# Altium PCB ST_LINK_V2.1.PcbDoc
Units mil, origin at the board's own origin, x right, y up, seen from the top; angles counter-clockwise.
Board outline 1520 x 655 mil, 2 copper layers (Top Layer, Bottom Layer); 55 components, 47 nets, 188 pads, 67 vias.
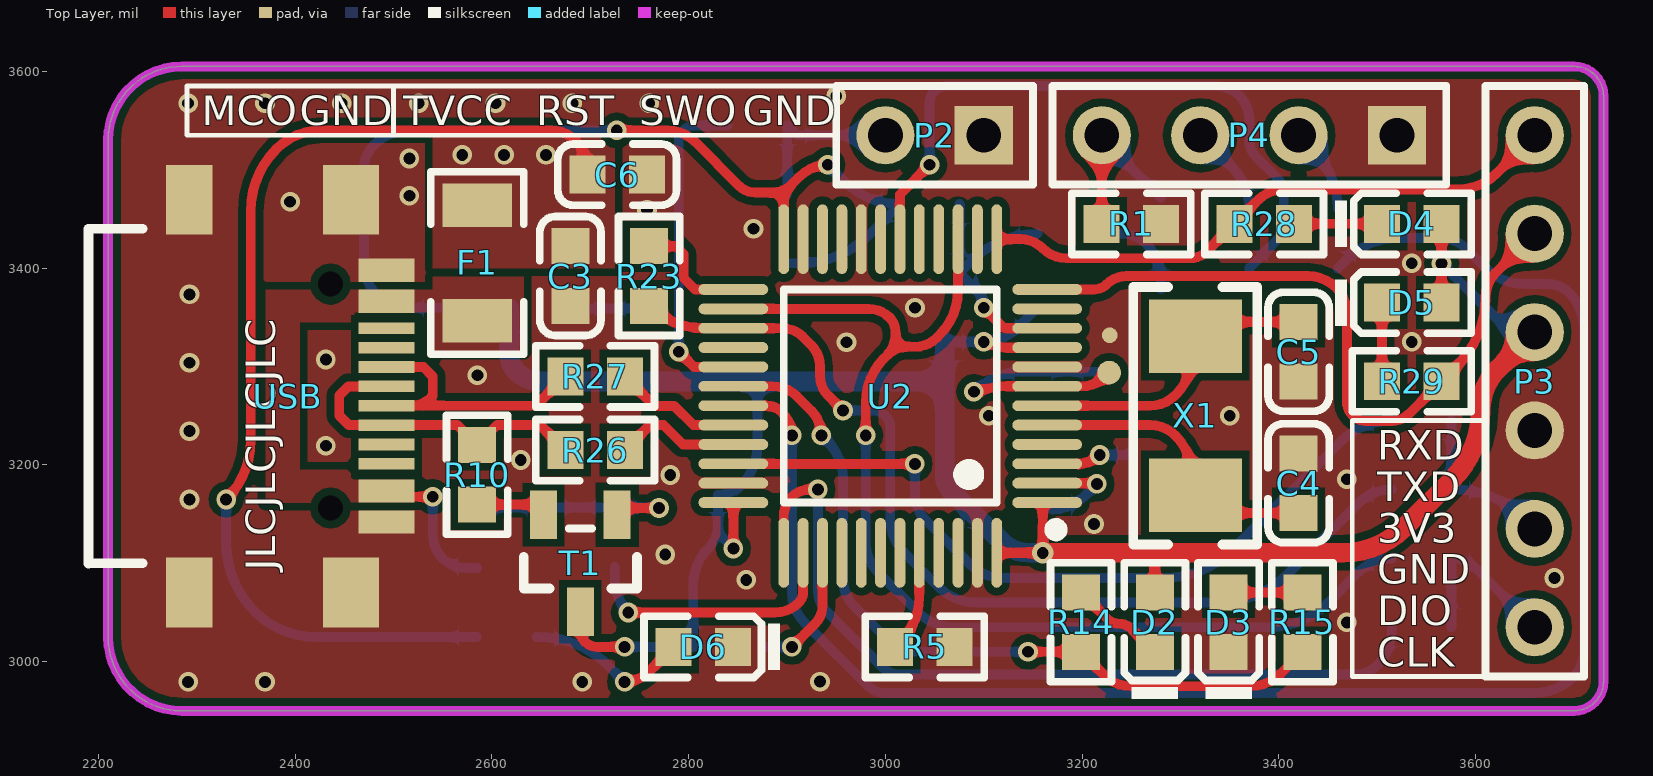
[diagram p0: Top Layer view]
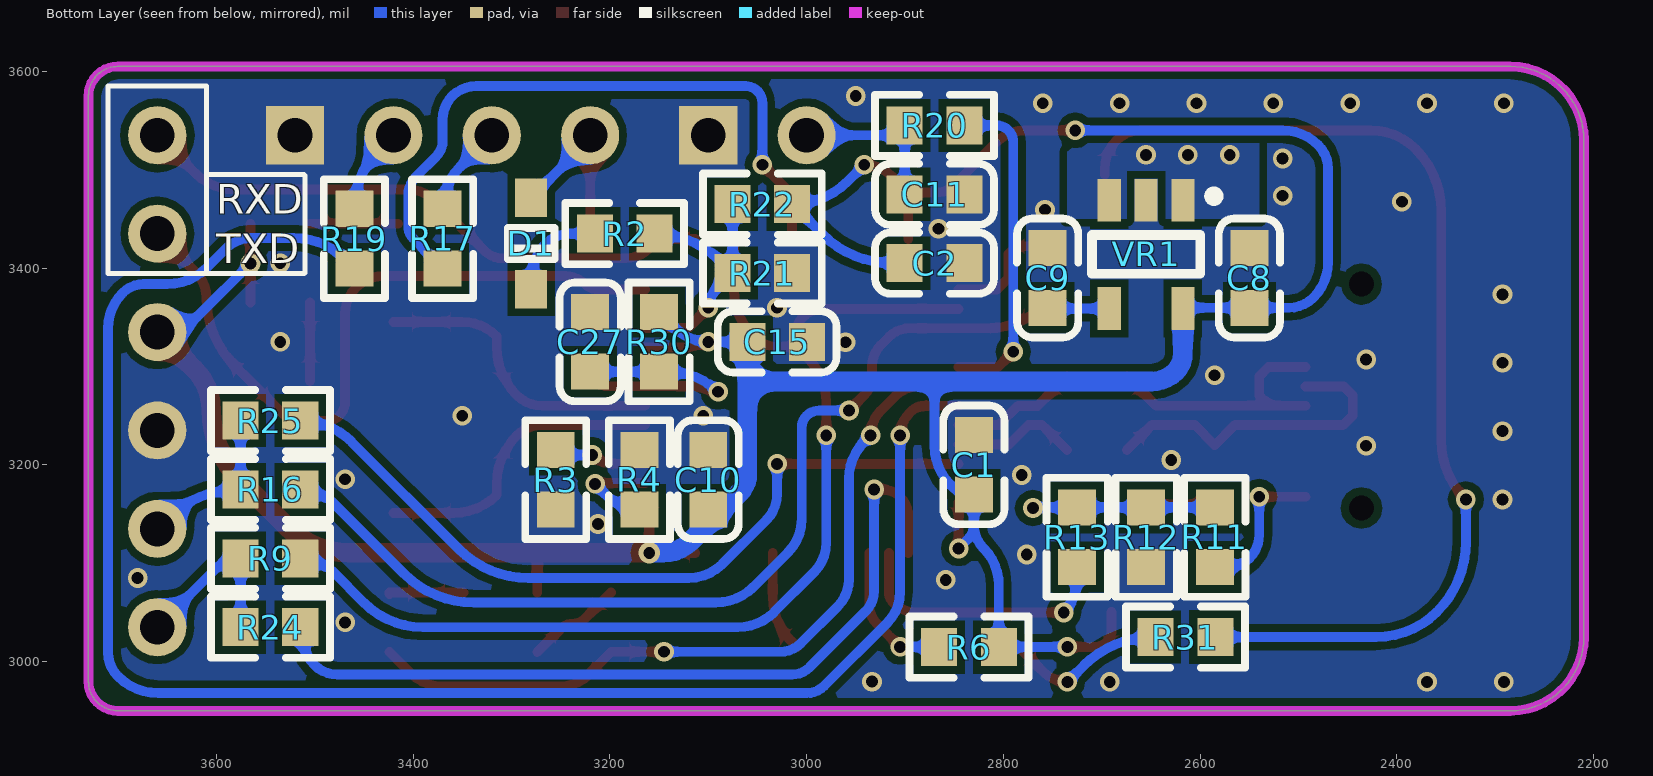
[diagram p1: Bottom Layer view, seen from below]
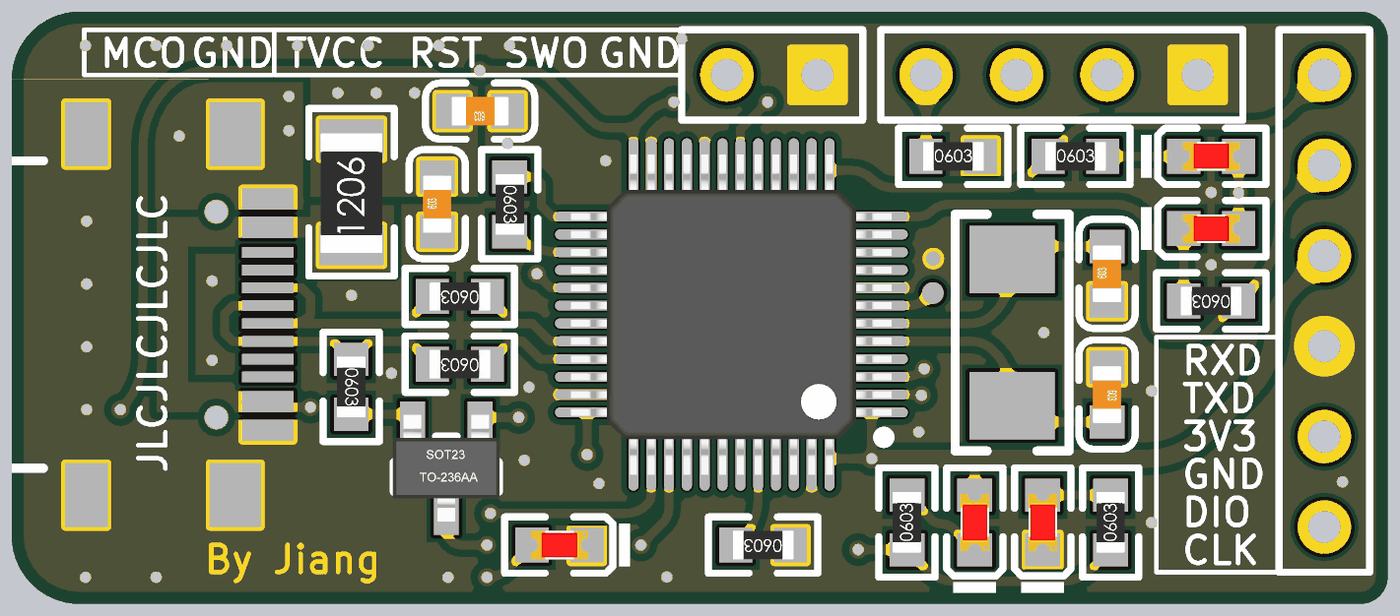
[diagram p2: 3D render of the assembled board from above, using the file's embedded part models]
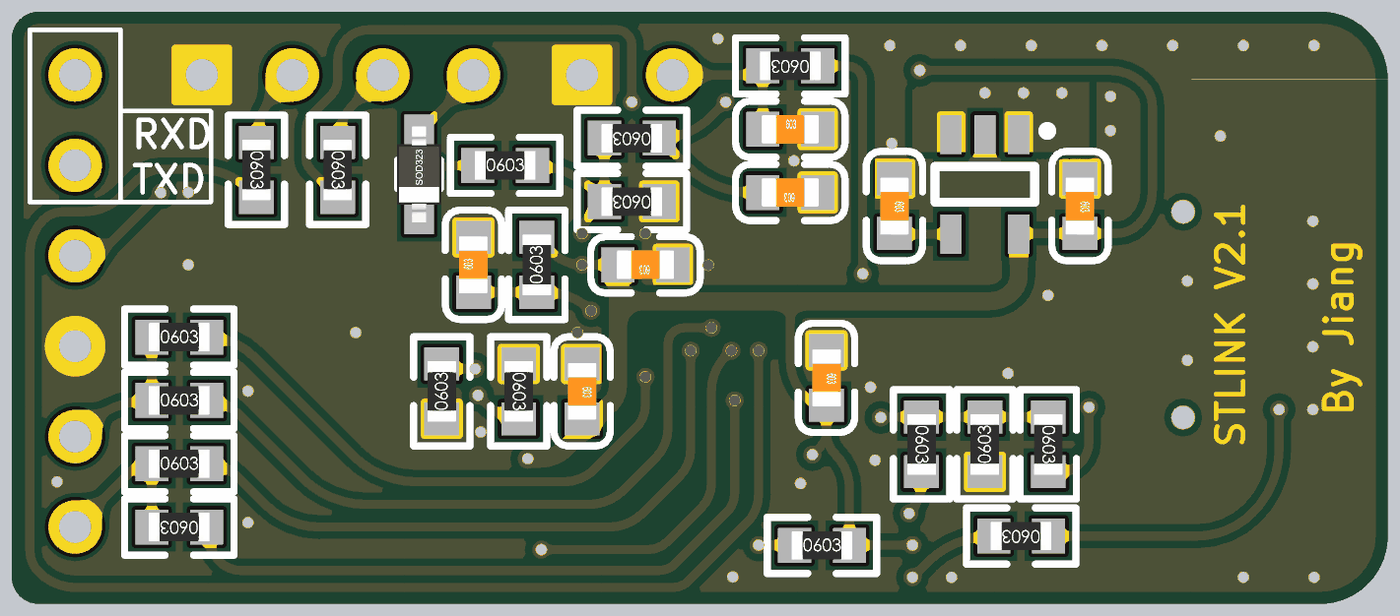
[diagram p3: 3D render of the assembled board from below, using the file's embedded part models]

## Layer stack, top to bottom
Top Solder: solder mask 0.4, Solder Resist, Dk 3.5
Top Layer: signal copper 1.4
Dielectric 1: dielectric 12.6, FR-4, Dk 4.8
Bottom Layer: signal copper 1.4
Bottom Solder: solder mask 0.4, Solder Resist, Dk 3.5

## Board outline
2285,2950 cw(c2285,3025) 2210,3025 2210,3530 cw(c2285,3530) 2285,3605 3700,3605 cw(c3700,3575) 3730,3575 3730,2980 cw(c3700,2980) 3700,2950

## Design rules (kind name [scope] priority, off if disabled: settings)
Clearance [All] p1: gap=8 ignorepadtopadclearanceinfootprint=TRUE except(0: Arc-Hole Track-Hole SMDPad-Hole THPad-Hole Via-Hole Fill-Hole Poly-Hole Region-Hole Text-Hole)
PolygonConnect PolygonConnect_8 [All vs IsNamedPolygon('Top Layer-5V_USB_CHG 1') Or  IsNamedPolygon('Top Layer-5V_USB_CHG') Or  IsNamedPolygon('Bottom Layer-5V_USB_CHG') Or  IsNamedPolygon('Bottom Layer-GND') Or  IsNamedPolygon('Top Layer-GND') Or  IsNamedPolygon('Top Layer-5V_USB_CHG 2')] p1: connectstyle=Direct reliefconductorwidth=10 reliefentries=4 polygonreliefangle="90 Angle" airgapwidth=10
PolygonConnect PolygonConnect_7 [All vs IsNamedPolygon('Top Layer-5V_USB_CHG 2')] p2: connectstyle=Direct reliefconductorwidth=10 reliefentries=4 polygonreliefangle="90 Angle" airgapwidth=10
PolygonConnect PolygonConnect_6 [All vs IsNamedPolygon('Top Layer-5V_USB_CHG 1')] p3: connectstyle=Direct reliefconductorwidth=10 reliefentries=4 polygonreliefangle="90 Angle" airgapwidth=10
PolygonConnect PolygonConnect_5 [All vs IsNamedPolygon('Top Layer-No Net') Or  IsNamedPolygon('Top Layer-5V_USB_CHG') Or  IsNamedPolygon('Bottom Layer-No Net') Or  IsNamedPolygon('Bottom Layer-5V_USB_CHG') Or  IsNamedPolygon('Top Layer-5V_USB_CHG 2')] p4: connectstyle=Direct reliefconductorwidth=10 reliefentries=4 polygonreliefangle="90 Angle" airgapwidth=10
PolygonConnect PolygonConnect_4 [All vs IsNamedPolygon('Top Layer-5V_USB_CHG 2')] p5: connectstyle=Direct reliefconductorwidth=10 reliefentries=4 polygonreliefangle="90 Angle" airgapwidth=10
PolygonConnect PolygonConnect_3 [All vs IsNamedPolygon('Top Layer-5V_USB_CHG 1') Or  IsNamedPolygon('Top Layer-5V_USB_CHG') Or  IsNamedPolygon('Bottom Layer-5V_USB_CHG')] p6: connectstyle=Direct reliefconductorwidth=10 reliefentries=4 polygonreliefangle="90 Angle" airgapwidth=10
PolygonConnect PolygonConnect_2 [All vs IsNamedPolygon('Top Layer-5V_USB_CHG') Or  IsNamedPolygon('Top Layer-5V_USB_CHG 1')] p7: connectstyle=Direct reliefconductorwidth=10 reliefentries=4 polygonreliefangle="90 Angle" airgapwidth=10
PolygonConnect PolygonConnect_1 [All vs IsNamedPolygon('Top Layer-5V_USB_CHG 1') Or  IsNamedPolygon('Top Layer-5V_USB_CHG')] p8: connectstyle=Direct reliefconductorwidth=10 reliefentries=4 polygonreliefangle="90 Angle" airgapwidth=10
PolygonConnect [All] p9: connectstyle=Relief reliefconductorwidth=10 reliefentries=4 polygonreliefangle="90 Angle" airgapwidth=10
RoutingVias [All] p1: holewidth=12 width=20 viastyle="Through Hole" minholewidth=12 minwidth=18 maxholewidth=28 maxwidth=50
SilkToSilkClearance [All] p1: silktosilkclearance=5
SilkToSolderMaskClearance [IsPad] p1: minsilkscreentomaskgap=5 clearancetoexposedcopper=TRUE
SolderMaskExpansion [All] p1: expansion=4 istentingtop=FALSE
Width [All] p1: maxlimit=50 minlimit=10 preferedwidth=10
28 further rules are at their usual default settings.

## Components (designator, comment, footprint, x,y, rotation, side; value= is the part's Value field where it differs from the comment)
C1 "Capacitor" 0603_C 2830,3200 r270 bottom value=100nF
C2 "Capacitor" 0603_C 2870,3405 r0 bottom value=100nF
C3 "104" 0603_C 2679.96,3391.97 r90 top
C4 "Capacitor" 0603_C 3420,3181.42 r270 top locked value=20pF
C5 "Capacitor" 0603_C 3420,3315 r90 top locked value=20pF
C6 "104" 0603_C 2727.4,3495 r180 top
C8 "104" 0603_C 2550,3390 r270 bottom
C9 "104" 0603_C 2755,3390 r270 bottom
C10 "Capacitor" 0603_C 3100,3185 r270 bottom value=100nF
C11 "20pF" 0603_C 2870,3475 r180 bottom
C15 "Capacitor" 0603_C 3030,3325 r0 bottom value=100nF
C27 "Capacitor" 0603_C 3220,3325 r90 bottom value=103
D1 "BAT60JFILM" SOD-323 3280,3425 r90 bottom
D2 "绿灯 0603" 0603_LED_S1 3273.86,3040 r90 top
D3 "红灯 0603" 0603_LED_S1 3348.86,3040 r90 top
D4 "红灯 0603" 0603_LED_S1 3535,3445 r0 top
D5 "红灯 0603" 0603_LED_S1 3535,3365 r0 top
D6 "红灯 0603" 0603_LED_S1 2815,3015 r180 top
F1 "Fuse 2" 1206_R 2585.31,3405.22 r90 top
P2 "Header 2" HDR1X2 3100,3535 r180 top locked
P3 "Header 6" HDR1X6 3660,3035 r90 top locked
P4 "Header 4" HDR1X4 3520,3535 r180 top locked
R1 "Resistor" 0603_R 3250,3445 r0 top value=10K
R2 "100R" 0603_R 3185,3435 r180 bottom value=22R
R3 "N/A" 0603_R 3255,3185 r90 bottom value=10K
R4 "Resistor" 0603_R 3170,3185 r270 bottom value=10K
R5 "Resistor" 0603_R 3040,3015 r180 top value=100K
R6 "Resistor" 0603_R 2835,3014.69 r180 bottom value=4.7K
R9 "Resistor" 0603_R 3545,3105 r180 bottom value=22R
R10 "Resistor" 0603_R 2585,3190 r270 top value=1K5
R11 "Resistor" 0603_R 2585,3126.42 r270 bottom value=10K
R12 "Resistor" 0603_R 2655,3126.42 r90 bottom value=36K
R13 "Resistor" 0603_R 2725,3126.42 r270 bottom value=100R
R14 "Resistor" 0603_R 3198.86,3040 r90 top value=330R
R15 "Resistor" 0603_R 3423.86,3040 r90 top value=330R
R16 "Resistor" 0603_R 3545,3175 r180 bottom value=22R
R17 "Resistor" 0603_R 3370,3430 r270 bottom value=22R
R19 "Resistor" 0603_R 3459.74,3430 r270 bottom value=22R
R20 "Resistor" 0603_R 2870,3545 r0 bottom value=100R
R21 "Resistor" 0603_R 3045,3395 r0 bottom value=4K7
R22 "Resistor" 0603_R 3045,3465 r0 bottom value=4K7
R23 "Resistor" 0603_R 2760,3391.97 r270 top value=100R
R24 "Resistor" 0603_R 3545,3035 r0 bottom value=0R
R25 "Resistor" 0603_R 3545,3245 r180 bottom value=0R
R26 "Resistor" 0603_R 2705,3215 r180 top value=10R
R27 "Resistor" 0603_R 2705,3290 r180 top value=10R
R28 "Resistor" 0603_R 3385,3445 r0 top value=1K
R29 "Resistor" 0603_R 3535,3285 r180 top value=1K
R30 "Resistor" 0603_R 3150,3325 r90 bottom value=10K
R31 "Resistor" 0603_R 2615,3025 r0 bottom value=1K
T1 "9013-SOT23" SOT-23(SOT-23-3) 2690,3100 r90 top
U2 "STM32F103CBT6" LQFP-48_7x7x05P 3005,3270 r90 top locked
USB "TYPE-C 12P" "TYPE-C 12P 贴片" 2190,3440 r270 top locked
VR1 "SPX3819M5-L-3-3" SOT-23-5 2655,3414.02 r90 bottom
X1 "XTAL_8M_NX3225GD" SMD-5032_2P 3315,3250 r90 top locked value=8.00Mhz

## Footprints (in the part's own frame and the unit in brackets; to place one, negate y for a bottom-side part, rotate by r counter-clockwise, add the part's x,y. Pads: shape width x height; smd on the part's side, far side on the other; paste and mask are expansions set on the pad)
0603_C [mm]
  rect 0.93x0.98 smd: 1(-0.77,0) 2(0.77,0)
  silkscreen extent -1.53,-0.79 1.54,0.79, body extent -0.8,-0.4 0.8,0.4, height 0.3
0603_LED_S1 [mm]
  rect 0.93x0.98 smd: A(0.77,0) K(-0.77,0)
  silkscreen extent -1.98,-0.79 1.54,0.79, body extent -0.8,-0.4 0.8,0.4, height 0.6
0603_R [mm]
  rect 0.93x0.98 smd: 1(-0.77,0) 2(0.77,0)
  silkscreen extent -1.53,-0.79 1.54,0.79, body extent -0.85,-0.4 0.85,0.4, height 0.56
1206_R [mm]
  rect 1.13x1.8 smd: 1(-1.49,0) 2(1.49,0)
  silkscreen extent -2.36,-1.2 2.35,1.2, body extent -1.7,-0.86 1.65,0.87, height 0.85
HDR1X2 [mm] "Connector; Header; 2 Position"
  rect 1.5x1.5 hole 0.9: 1(0,0)
  round 1.5 hole 0.9: 2(2.54,0)
  silkscreen extent -1.27,-1.27 3.81,1.27
HDR1X4 [mm] "Connector; Header; 4 Position"
  rect 1.5x1.5 hole 0.9: 1(0,0)
  round 1.5 hole 0.9: 2(2.54,0) 3(5.08,0) 4(7.62,0)
  silkscreen extent -1.27,-1.27 8.89,1.27
HDR1X6 [mm] "Connector; Header; 6 Position"
  round 1.5 hole 0.9: 1(0,0) 2(2.54,0) 3(5.08,0) 4(7.62,0) 5(10.16,0) 6(12.7,0)
  silkscreen extent -1.27,-1.27 13.97,1.27
LQFP-48_7x7x05P [mm]
  oval 0.28x1.8 smd mask+0.051: 1(-2.75,-4.05) 2(-2.25,-4.05) 3(-1.75,-4.05) 4(-1.25,-4.05) 5(-0.75,-4.05) 6(-0.25,-4.05) 7(0.25,-4.05) 8(0.75,-4.05) 9(1.25,-4.05) 10(1.75,-4.05) 11(2.25,-4.05) 12(2.75,-4.05) 25(2.75,4.05) 26(2.25,4.05) 27(1.75,4.05) 28(1.25,4.05) 29(0.75,4.05) 30(0.25,4.05) 31(-0.25,4.05) 32(-0.75,4.05) 33(-1.25,4.05) 34(-1.75,4.05) 35(-2.25,4.05) 36(-2.75,4.05)
  oval 1.8x0.28 smd mask+0.051: 13(4.05,-2.75) 14(4.05,-2.25) 15(4.05,-1.75) 16(4.05,-1.25) 17(4.05,-0.75) 18(4.05,-0.25) 19(4.05,0.25) 20(4.05,0.75) 21(4.05,1.25) 22(4.05,1.75) 23(4.05,2.25) 24(4.05,2.75) 37(-4.05,2.75) 38(-4.05,2.25) 39(-4.05,1.75) 40(-4.05,1.25) 41(-4.05,0.75) 42(-4.05,0.25) 43(-4.05,-0.25) 44(-4.05,-0.75) 45(-4.05,-1.25) 46(-4.05,-1.75) 47(-4.05,-2.25) 48(-4.05,-2.75)
  silkscreen extent -3.6,-4.42 2.75,2.75, body extent -4.5,-4.5 4.5,4.5, height 1.6
SMD-5032_2P [mm]
  rect 1.9x2.4 smd: 1(-2.05,0) 2(2.05,0)
  silkscreen extent -3.32,-1.6 3.32,1.6
SOD-323 [mm]
  rect 1x0.83 smd: 1(1.18,0) 2(-1.18,0)
  silkscreen extent -0.4,-0.6 0.4,0.6, body extent -1.35,-0.63 1.35,0.63, height 1.1
SOT-23(SOT-23-3) [mm]
  rect 1.25x0.7 smd: 1(1.25,-0.95) 2(1.25,0.95) 3(-1.25,0)
  silkscreen extent -0.65,-1.46 0.9,1.46, body extent -1.5,-1.5 1.5,1.5, height 1.3
SOT-23-5 [mm]
  rect 1.1x0.6 smd: 1(1.4,-0.95) 2(1.4,0) 3(1.4,0.95) 4(-1.4,0.95) 5(-1.4,-0.95)
  silkscreen extent -0.5,-1.87 1.62,1.4
"TYPE-C 12P 贴片" [mm]
  rect 1.8x1.45 smd: 0(-0.75,6.78) 0(9.39,6.78)
  rect 1.8x1.2 smd: 0(-0.75,2.6) 0(9.39,2.6)
  round 0 hole 0.65: 5(1.43,6.25) 5(7.21,6.25)
  rect 0.3x1.45 smd: A1(0.92,7.695) A4(1.72,7.695) A5(3.07,7.695) A6(4.07,7.695) A7(4.57,7.695) A8(5.57,7.695) A9(6.92,7.695) A12(7.72,7.695) B1(7.42,7.695) B4(6.62,7.695) B5(6.07,7.695) B6(5.07,7.695) B7(3.57,7.695) B8(2.57,7.695) B9(2.02,7.695) B12(1.22,7.695)
  silkscreen extent 0,0 8.64,1.4, body extent 0,0 8.64,8, height 3.21

## Part data
C1 C2 C10 C15 C27: library part MCD-00211, "Capacitor, MLCC, 100nF, 16V, X7R, 10%, 0603, T=0,8mm", Manufacturer=YAGEO, Manufacturer_Part_Number=CC0603KRX7R7BB104, Package=C0603, ComponentLink1Description=Yageo_Capacitor_X7R-series.pdf, ComponentLink1URL=http://tunmcdsvn.tun.st.com/Component_Datasheet_Library/Trunk/Capacitors/Yageo_Capacitor_X7R-series.pdf, ECCN_EU=n/a, ECCN_US=n/a, Initial_Board_Reference=mb1319, Internal_Part_Number=MCD-00211, Part_Type=Capacitor, Provided_By=Subcon, Status=Released
C3 C6 C8 C9: library part "0603 2.7pF (2R7) 0.25pF 50V", "贴片电容", Package=0603, SuppliersPartNumber=C16149, ComponentLink1Description=供?, ComponentLink1URL=http://www.szlcsc.com/product/details_16831.html, Supplier=LC
C4 C5: library part MCD-00637, "Capacitor, MLCC, 10pF, 50V, NPO, 5%, 0603, T=0,8mm", Manufacturer=YAGEO, Manufacturer_Part_Number=CC0603JRNPO9BN100, Package=C0603, ComponentLink1Description=Yageo_Capacitor_NP0_16V-to-50V.pdf, ComponentLink1URL=http://tunmcdsvn.tun.st.com/Component_Datasheet_Library/Trunk/Capacitors/Yageo_Capacitor_NP0_16V-to-50V.pdf, ECCN_EU=n/a, ECCN_US=n/a, Initial_Board_Reference=mb1319, Internal_Part_Number=MCD-00637, Part_Type=Capacitor, Provided_By=subcon, Status=Released
C11: library part MCD-00638, "Capacitor, MLCC, 20pF, 50V, NPO, 5%, 0603, T=0,8mm", Manufacturer=YAGEO, Manufacturer_Part_Number=CC0603JRNPO9BN200, Package=C0603, ComponentLink1Description=Yageo_Capacitor_NP0_16V-to-50V.pdf, ComponentLink1URL=http://tunmcdsvn.tun.st.com/Component_Datasheet_Library/Trunk/Capacitors/Yageo_Capacitor_NP0_16V-to-50V.pdf, ECCN_EU=n/a, ECCN_US=n/a, Initial_Board_Reference=mb1319, Internal_Part_Number=MCD-00638, Part_Type=Capacitor, Provided_By=Subcon, Status=Released
D1: library part MCD-00034, Manufacturer=STMICROELECTRONICS, ComponentLink1Description=STM_Diode_BAT60JFILM-SOD323.pdf, ComponentLink1URL=http://tunmcdsvn.tun.st.com/Component_Datasheet_Library/Trunk/Diodes/STM_Diode_BAT60JFILM-SOD323.pdf, ECCN_EU=NEC, ECCN_US=EAR99, Initial_Board_Reference=mb1274, Internal_Part_Number=MCD-00034, Manufacturer_Part_Number=BAT60JFILM, Part_Type=Diode, Provided_By=Subcon, Status=Released
D2: library part "0603 绿灯", "发光二极管", Package=0603, SuppliersPartNumber=C72043, ComponentLink1Description=供?, ComponentLink1URL=http://www.szlcsc.com/product/details_73152.html, Supplier=LC
D3 D4 D5 D6: library part "0603 红灯", "发光二极管", Package=0603, SuppliersPartNumber=C2286, ComponentLink1Description=供?, ComponentLink1URL=http://www.szlcsc.com/product/details_2659.html, Supplier=LC
F1: "Fuse", LatestRevisionDate=17-Jul-2002, LatestRevisionNote="Re-released for DXP Platform.", PackageDescription="Thru-Hole; 2 Leads", PackageReference=PIN-W2/E2.8, Published=8-Jun-2000, Publisher="Altium Limited"
P2: "Header, 2-Pin", LatestRevisionDate=17-Jul-2002, LatestRevisionNote="Re-released for DXP Platform.", Publisher="Altium Limited"
P3: "Header, 6-Pin", LatestRevisionDate=17-Jul-2002, LatestRevisionNote="Re-released for DXP Platform.", Publisher="Altium Limited"
P4: "Header, 4-Pin", LatestRevisionDate=17-Jul-2002, LatestRevisionNote="Re-released for DXP Platform.", Publisher="Altium Limited"
R1 R3 R4 R11: library part MCD-00220, "Resistor,10K,0603,1%,1/10W", Manufacturer=YAGEO, Manufacturer_Part_Number=RC0603FR-0710KL, Package=R0603, ComponentLink1Description=Yageo_Resistor_RC0603-series.pdf, ComponentLink1URL=http://tunmcdsvn.tun.st.com/Component_Datasheet_Library/Trunk/Resistors/Yageo_Resistor_RC0603-series.pdf, ECCN_EU=n/a, ECCN_US=n/a, Initial_Board_Reference=mb1319, Internal_Part_Number=MCD-00220, Part_Type=Resistor, Provided_By=Subcon, Status=Released
R2 R9 R16 R17 R19 R24 R25: library part MCD-00066, "Resistor,22R,0603,1%,1/10W", Manufacturer=YAGEO, Manufacturer_Part_Number=RC0603FR-0722RL, Package=R0603, ComponentLink1Description=Yageo_Resistor_RC0603-series.pdf, ComponentLink1URL=http://tunmcdsvn.tun.st.com/Component_Datasheet_Library/Trunk/Resistors/Yageo_Resistor_RC0603-series.pdf, ECCN_EU=n/a, ECCN_US=n/a, Initial_Board_Reference=mb1274, Internal_Part_Number=MCD-00066, Part_Type=Resistor, Provided_By=Subcon, Status=Released
R5 R30: library part MCD-00223, "Resistor,100K,0603,1%,1/10W", Manufacturer=YAGEO, Manufacturer_Part_Number=RC0603FR-07100KL, Package=R0603, ComponentLink1Description=Yageo_Resistor_RC0603-series.pdf, ComponentLink1URL=http://tunmcdsvn.tun.st.com/Component_Datasheet_Library/Trunk/Resistors/Yageo_Resistor_RC0603-series.pdf, ECCN_EU=n/a, ECCN_US=n/a, Initial_Board_Reference=mb1319, Internal_Part_Number=MCD-00223, Part_Type=Resistor, Provided_By=Subcon, Status=Released
R6 R14 R15 R28 R29 R31: library part MCD-00197, "Resistor,330R,0603,1%,1/10W", Manufacturer=YAGEO, Manufacturer_Part_Number=RC0603FR-07330RL, Package=R0603, ComponentLink1Description=Yageo_Resistor_RC0603-series.pdf, ComponentLink1URL=http://tunmcdsvn.tun.st.com/Component_Datasheet_Library/Trunk/Resistors/Yageo_Resistor_RC0603-series, ECCN_EU=n/a, ECCN_US=n/a, Internal_Part_Number=MCD-00197, Part_Type=Resistor, Provided_By=Subcon, Status=Released
R10: library part MCD-00217, "Resistor,1K5,0603,1%,1/10W", Manufacturer=YAGEO, Manufacturer_Part_Number=RC0603FR-071K5L, Package=R0603, ComponentLink1Description=Yageo_Resistor_RC0603-series.pdf, ComponentLink1URL=http://tunmcdsvn.tun.st.com/Component_Datasheet_Library/Trunk/Resistors/Yageo_Resistor_RC0603-series.pdf, ECCN_EU=n/a, ECCN_US=n/a, Initial_Board_Reference=mb1319, Internal_Part_Number=MCD-00217, Part_Type=Resistor, Provided_By=Subcon, Status=Released
R12: library part MCD-00221, "Resistor,36K,0603,1%,1/10W", Manufacturer=YAGEO, Manufacturer_Part_Number=RC0603FR-0736KL, Package=R0603, ComponentLink1Description=Yageo_Resistor_RC0603-series.pdf, ComponentLink1URL=http://tunmcdsvn.tun.st.com/Component_Datasheet_Library/Trunk/Resistors/Yageo_Resistor_RC0603-series.pdf, ECCN_EU=n/a, ECCN_US=n/a, Initial_Board_Reference=mb1319, Internal_Part_Number=MCD-00221, Part_Type=Resistor, Provided_By=Subcon, Status=Released
R13 R20 R23 R26 R27: library part MCD-00224, "Resistor,100R,0603,1%,1/10W", Manufacturer=YAGEO, Manufacturer_Part_Number=RC0603FR-07100RL, Package=R0603, ComponentLink1Description=Yageo_Resistor_RC0603-series.pdf, ComponentLink1URL=http://tunmcdsvn.tun.st.com/Component_Datasheet_Library/Trunk/Resistors/Yageo_Resistor_RC0603-series.pdf, ECCN_EU=n/a, ECCN_US=n/a, Initial_Board_Reference=mb1319, Internal_Part_Number=MCD-00224, Part_Type=Resistor, Provided_By=Subcon, Status=Released
R21 R22: library part MCD-00219, "Resistor,4K7,0603,1%,1/10W", Manufacturer=YAGEO, Manufacturer_Part_Number=RC0603FR-074K7L, Package=R0603, ComponentLink1Description=Yageo_Resistor_RC0603-series.pdf, ComponentLink1URL=http://tunmcdsvn.tun.st.com/Component_Datasheet_Library/Trunk/Resistors/Yageo_Resistor_RC0603-series.pdf, ECCN_EU=n/a, ECCN_US=n/a, Initial_Board_Reference=mb1319, Internal_Part_Number=MCD-00219, Part_Type=Resistor, Provided_By=Subcon, Status=Released
T1: library part MCD-00073, "NPN Bipolar Transistor", Manufacturer=NXP, Manufacturer_Part_Number=BSR14, ComponentLink1Description=NXP_Transistor_BSR14.pdf, ComponentLink1URL=http://tunmcdsvn.tun.st.com/Component_Datasheet_Library/Trunk/IC/NXP_Transistor_BSR14.pdf, ECCN_EU=NEC, ECCN_US=EAR99, Initial_Board_Reference=mb1274, Internal_Part_Number=MCD-00073, Part_Type=IC, Provided_By=Subcon, Status=Released
U2: library part MCD-00085, "Medium-density performance line ARM-based 32-bit MCU with 128KB Flash", Manufacturer=STMICROELECTRONICS, ComponentLink1Description=STM_STM32F103CBT6.pdf, ComponentLink1URL=http://tunmcdsvn.tun.st.com/Component_Datasheet_Library/Trunk/IC/STM_STM32F103CBT6.pdf, ECCN_EU=NEC, ECCN_US=3A991A2, Initial_Board_Reference=mb1274, Internal_Part_Number=MCD-00085, Manufacturer_Part_Number=STM32F103CBT6, Part_Type=IC, Provided_By=Subcon, Status=Released
VR1: "LDO"
X1: library part MCD-00092, "Crystal 8Mhz, 8pF, -+50PPM, SMD", Manufacturer=NDK, Manufacturer_Part_Number="NX3225GD 8MHz EXS00A-CG04874", ComponentLink1Description="NDK_Crystal-For-ST_NX3225GD 8MHz EXS00A-CG04874 (EXS10B-20725).pdf", ComponentLink1URL="http://tunmcdsvn.tun.st.com/Component_Datasheet_Library/Trunk/Crystal_Osc/NDK_Crystal-For-ST_NX3225GD 8MHz EXS00A-CG04874 (EXS10B-20725).pdf", ECCN_EU=NEC, ECCN_US=EAR99, Initial_Board_Reference=mb1274, Internal_Part_Number=MCD-00092, Part_Type=Crystal_Osc, Provided_By=STM, Status=Released

## Free pads (board coordinates)
  round 24 smd: 9(3227.46,3293.78)
  round 16 smd: 10(3227.98,3331.84)

## Via types
v1: diameter 20, hole 12, Top Layer to Bottom Layer, tented both sides, 66 vias
v2: diameter 22, hole 12, Top Layer to Bottom Layer, tented both sides, 1 vias

## Nets (pads, with @x,y where several pads share a name; then routed paths per layer and width w, separated by ;. In a path a pad name is that pad's centre, name@x,y a point inside that pad or via, vN(x,y) a via of type N, cw(c..) or ccw(c..) an arc to the next point about the centre after c; other vN are vias at no path point)
3V3_STLK: C1.2 C2.2 C8.2 C10.2 C15.2 D2.A D4.A D5.A P3.4 R6.2 R22.1 R30.2 T1.3 U2.1 U2.9 U2.24 U2.36 U2.48 VR1.5 | length 3491.5
  Top Layer w10: T1.3 2690,3032.07 ccw(c2707.07,3032.07) 2695,3020 ccw(c2707.07,3032.07) 2707.07,3015 v1(2735,3015) ; v1(2727,3540) 2778.79,3540 cw(c2778.79,3500.86) 2806.46,3528.54 2851.43,3483.57 ccw(c2867.94,3500.08) 2867.94,3476.73 2896.73,3476.73 ; v1(2845.55,3115.08) U2.36 ; U2.24 2896.73,3476.73 ; v1(2941.37,3505) ccw(c2941.37,3465.47) 2913.42,3493.42 2896.73,3476.73 ; v1(3100,3325) 3120.79,3319.21 U2.9 ; U2.48 v2(3160,3110.55) 3160,3161.73 U2.1 ; D2.A 3273.86,3110.55 ; D5.A v1(3565.31,3404.69) D4.A
  Top Layer w20: v2(3160,3110.55) 3273.86,3110.55 3465,3110.55 ccw(c3465,3198.79) 3527.39,3136.4 3575.79,3184.79 ccw(c3505.26,3255.31) 3605,3255.31 cw(c3664.59,3255.31) 3622.45,3297.45 P3.4
  Bottom Layer w10: VR1.5 ccw(c2615.7,3357) 2615.7,3359.69 C8.2 2509.9,3359.69 cw(c2509.9,3394.9) 2485,3370 cw(c2521.21,3406.21) 2470,3406.21 2470,3500.86 cw(c2504.14,3500.86) 2480,3525 cw(c2516.21,3488.79) 2516.21,3540 v1(2727,3540) ; v1(2735,3015) 2804.37,3015 R6.2 2804.68,3078.03 cw(c2856.97,3078.03) 2820,3115 ccw(c2795.86,3139.14) 2830,3139.14 ; v1(2845.55,3115.08) 2836.02,3124.61 cw(c2850.55,3139.14) 2830,3139.14 ; 2870,3220 2870,3219.23 ; 2870,3284.69 2870,3219.23 ; C2.2 2913.26,3405 ccw(c2913.26,3505) 2983.97,3434.29 R22.1 cw(c3014.69,3545.42) 2957.82,3488.55 v1(2941.37,3505) 2941.37,3504.7 v1@2943.88,3502.19 ; C15.2 v1(3100,3325) ccw(c3100,3372.52) 3133.6,3338.92 R30.2 ; v1(3565.31,3404.69) 3617.33,3352.67 ccw(c3660,3395.36) P3.4 ; 2830,3139.14 C1.2 ccw(c2830,3202.94) 2853.51,3179.42 ccw(c2813.71,3219.23) 2870,3219.23
  Bottom Layer w20: VR1.5 2617.6,3312.87 ccw(c2642.87,3312.87) 2625,3295 ccw(c2649.9,3319.9) 2649.9,3284.69 2870,3284.69 3060.31,3284.69 ; C15.2 3060.31,3284.69 ; 3068.5,3171.19 cw(c3088.25,3190.94) 3060.31,3190.94 3060.31,3284.69 ; 3068.5,3171.56 3117.65,3122.41 ccw(c3146.28,3151.04) 3146.28,3110.55 v2(3160,3110.55)
5V_USB_CHG: F1.1 R11.2 USB.A4 USB.A9 USB.B4 USB.B9 | length 149.9
  Top Layer w10: USB.A9 v1(2540,3167.56)
  Bottom Layer w10: v1(2540,3167.56) 2540,3129.14 ccw(c2574.14,3129.14) 2550,3105 ccw(c2573.76,3128.76) 2573.76,3095.16 R11.2@2585,3095.16
AIN_1: R2.2 R21.2 R22.2 U2.10 | length 280.3
  Top Layer w10: v1(3100,3359.68) 3120.79,3338.9 U2.10
  Bottom Layer w10: R22.2@3076.03,3464.29 R22.2 R21.2 ; v1(3100,3359.68) ccw(c3074.34,3359.68) 3092.48,3377.83 R21.2 ; R2.2 ccw(c3154.68,3339.95) 3087.48,3407.16 R21.2
GND: C1.1 C2.1 C3.1 C4.1 C5.1 C6.1 C8.1 C9.1 C10.1 C11.2 C15.1 C27.2 D3.K D6.K P2.1 P3.3 P4.1 pad.10 R1.2 R3.1 R4.1 R5.1 R12.1 R21.1 U2.8 U2.20 U2.23 U2.35 U2.47 USB.0 USB.A1 USB.A12 USB.B1 USB.B12 VR1.2
  other v1: 2291.36,2979.43 2369.47,2979.43 2691.89,2979.43 2933.61,2979.69 3469.11,3039.9 2858.65,3083.1 3680,3085 2776.36,3108.9 3212,3140 2292.72,3164.85 3469.11,3185.37 2781.36,3189.69 2629.48,3204.97 2431.36,3219.42 2292.72,3234.33 3105,3250 3350,3250 2585.31,3291.19 2292.72,3303.81 2431.36,3307.09 2960.57,3324.69 3535,3325 3030.19,3359.68 2292.72,3373.29 3535,3405 2865.99,3440.02 2757.72,3459.37 2395,3467.37 2516.26,3473.46 2516.26,3511.32 2291.36,3567.47 2369.47,3567.47 2447.57,3567.47 2525.68,3567.47 2603.79,3567.47 2681.89,3567.47 2760,3567.47 2950,3575
LED_STLK: R14.1 R15.1 U2.30 | length 798.1
  Top Layer w10: U2.30 2885.62,3279.84 cw(c2885.62,3245.03) 2910.24,3269.65 2924.47,3255.41 cw(c2899.07,3230) v1(2935,3230) ; v1(3145,3010) 3198.54,3010 R14.1 3222.21,2986.34 ccw(c3249.58,3013.71) 3249.58,2975 3370.86,2975 ccw(c3370.86,3019.22) 3402.12,2987.95 R15.1
  Bottom Layer w10: v1(2935,3230) 2941.53,3223.47 cw(c2903.97,3185.91) 2957.09,3185.91 2957.09,3083.45 ccw(c2995.65,3083.45) 2968.38,3056.18 3005.75,3018.81 ccw(c3027.01,3040.07) 3027.01,3010 v1(3145,3010)
MCO: C11.1 P2.2 R20.2 | length 173.8
  Bottom Layer w10: C11.1 R20.2 2910.32,3535 P2.2
NetC3_2: C3.2 C6.2 F1.2 R31.1 VR1.1 VR1.3 | length 1074
  Top Layer w10: v1(2330,3164.85) ccw(c2269.64,3225.21) 2355,3225.21 2355,3457.57 cw(c2445.36,3457.57) 2381.46,3521.46 cw(c2426.21,3476.72) 2426.21,3540 2660.86,3540 cw(c2660.86,3505.86) 2685,3530 cw(c2655.82,3500.82) 2697.09,3500.82 C6.2
  Bottom Layer w10: v1(2330,3164.85) 2330,3121.42 ccw(c2430,3121.42) 2359.29,3050.71 ccw(c2421.36,3112.78) 2421.36,3025 R31.1
  other v1: 2570,3515.07 2612.5,3515.07 2655,3515.07
NetC9_2: C9.2 VR1.4 | length 62.8
  Bottom Layer w10: VR1.4 2753.1,3358.9 ccw(c2753.1,3361.59) C9.2
NetD1_2: D1.2 R2.1 | length 102.8
  Bottom Layer w10: R2.1 3240.86,3435 cw(c3240.86,3400.86) 3265,3425 cw(c3228.79,3388.79) 3280,3388.79 D1.2
NetD2_K: D2.K R14.2 | length 98.6
  Top Layer w10: R14.2 3225.91,3043.26 ccw(c3237.32,3054.68) 3237.32,3038.54 cw(c3237.32,3019.99) 3250.44,3033.1 D2.K
NetD3_A: D3.A R15.2 | length 76.5
  Top Layer w10: D3.A R15.2 R15.2@3423.86,3068.86
NetD4_K: D4.K R28.2 | length 89.4
  Top Layer w10: R28.2 D4.K
NetD5_K: D5.K R29.2 | length 80
  Top Layer w10: R29.2 D5.K
NetD6_A: D6.A R31.2 | length 167.2
  Top Layer w10: v1(2735,2979.43) ccw(c2735,3013.51) 2759.1,2989.41 D6.A
  Bottom Layer w10: R31.2 2648.01,3025 cw(c2648.01,2925) 2718.72,2995.71 v1(2735,2979.43)
NetP3_1: P3.1 R9.1 R24.2 | length 182.2
  Bottom Layer w10: R24.2 R9.1 cw(c3575.31,3069.55) 3600.38,3094.62 P3.1
NetP3_2: P3.2 R16.1 R25.1 | length 167
  Bottom Layer w10: R25.1 R16.1 3578.58,3175 cw(c3578.58,3075) 3649.29,3145.71 P3.2
NetP4_2: P4.2 R19.1 | length 87.5
  Bottom Layer w10: P4.2 3435.02,3519.98 cw(c3375.36,3460.32) R19.1
NetP4_3: P4.3 R17.1 | length 92.8
  Bottom Layer w10: P4.3 3352.55,3502.45 cw(c3310.41,3460.32) R17.1
NetR3_2: R3.2 U2.3 | length 90.1
  Top Layer w10: U2.3 3196.52,3201.1 ccw(c3196.52,3231.48) v1(3218,3210)
  Bottom Layer w10: v1(3218,3210) 3244.68,3210 R3.2@3250,3215.32
NetR4_2: R4.2 U2.2 | length 104.5
  Top Layer w10: U2.2 3213.29,3181.42 cw(c3213.29,3179) v1(3215,3180.71)
  Bottom Layer w10: R4.2 ccw(c3170,3200.5) 3202.39,3168.1 v1(3215,3180.71)
NetR5_2: R5.2 U2.44 | length 103.1
  Top Layer w10: R5.2 3016.08,3021.4 ccw(c2971.55,3065.93) 3034.53,3065.93 U2.44
NetR6_1: R6.1 U2.39 | length 132.3
  Top Layer w10: v1(2905,3015) 2928.54,3038.54 ccw(c2910.27,3056.8) 2936.1,3056.8 U2.39
  Bottom Layer w10: R6.1@2880.31,3015 2880.63,3014.69 2880.94,3015 v1(2905,3015)
NetR10_2: R10.2 T1.2 | length 71.9
  Top Layer w10: R10.2 2642.13,3159.68 T1.2
NetR11_1: R11.1 R12.2 R13.1 T1.1 | length 231
  Top Layer w10: T1.1 2734.33,3156.14 v1(2770,3156.14)
  Bottom Layer w10: R11.1 R12.2 R13.1 2768.7,3156.73 2769.65,3155.79 v1(2770,3156.14)
NetR20_1: R20.1 U2.29 | length 334.3
  Top Layer w10: v1(2790,3315) 2805.47,3299.53 U2.29
  Bottom Layer w10: v1(2790,3315) 2790,3527.93 cw(c2807.07,3527.93) 2795,3540 cw(c2807.07,3527.93) 2807.07,3545 R20.1
NetR26_1: R26.1 U2.33 | length 128.9
  Top Layer w10: R26.1 2760.79,3240.47 2774.53,3240.47 2794.21,3220.79 U2.33
NetR27_1: R27.1 U2.32 | length 130.8
  Top Layer w10: R27.1 2765.31,3260 2785.46,3260 2804.98,3240.47 U2.32
OSC_IN: C4.2 U2.5 X1.1 | length 308.9
  Top Layer w10: U2.5 3269.24,3240.47 cw(c3269.24,3204.72) 3294.53,3230 cw(c3245.1,3180.57) 3315,3180.57 X1.1 ccw(c3358.91,3213.2) 3358.91,3151.1 C4.2
OSC_OUT: C5.2 U2.6 X1.2 | length 307.3
  Top Layer w10: U2.6 3269.24,3260.16 ccw(c3269.24,3295.91) 3294.53,3270.63 ccw(c3245.1,3320.05) 3315,3320.05 X1.2 cw(c3350.26,3295.45) 3350.26,3345.31 C5.2
PWR_ENn: U2.28
STL_USB_D_N: R27.2 USB.A7 USB.B7 | length 279.1
  Top Layer w10: USB.A7 2530.08,3260.08 ; USB.B7 2530.55,3299.45 2540,3290 2540,3270 2530.08,3260.08 ; R27.2 2644.76,3260.08 2530.08,3260.08
STL_USB_D_P: R10.1 R26.2 USB.A6 USB.B6 | length 333.2
  Top Layer w10: USB.A6 2454.13,3279.76 2445,3270.63 2445,3250 2454.61,3240.39 USB.B6 2564.92,3240.39 R10.1 2585.31,3220.31 2605.47,3240.47 2649.21,3240.47 R26.2
STLK_RX: P3.6 R28.1 U2.13 | length 598.7
  Top Layer w10: U2.13 3137.19,3429.45 cw(c3137.19,3397.19) 3160,3420 ccw(c3183.97,3443.97) 3183.97,3410.07 3310,3410.07 ccw(c3310,3433.63) 3326.65,3416.96 R28.1 3378.86,3469.17 cw(c3405,3443.03) 3405,3480 3582.05,3480 ccw(c3582.05,3535.4) 3621.23,3496.23 P3.6
STLK_TX: P3.5 R29.1 U2.12 | length 726
  Top Layer w10: U2.12 3211.94,3378.27 ccw(c3211.94,3396.82) 3225.06,3383.7 cw(c3245.02,3363.74) 3245.02,3391.97 3429.54,3391.97 cw(c3429.54,3351.51) 3458.15,3380.12 cw(c3431.69,3353.66) 3469.11,3353.66 3469.11,3264.22 ccw(c3489.22,3264.22) 3475,3250 ccw(c3487.83,3262.83) 3487.83,3244.69 3515,3244.69 ccw(c3515,3268.83) 3532.07,3251.76 R29.1 3581.49,3301.18 ccw(c3512.67,3370) 3610,3370 cw(c3646.21,3370) 3620.61,3395.61 P3.5
STM_JTCK: R24.1 U2.37 | length 844.3
  Top Layer w10: U2.37 2896.73,3147.6 cw(c2924.96,3147.6) 2905,3167.56 cw(c2922.96,3149.6) 2922.96,3175 v1(2931.42,3175)
  Bottom Layer w10: v1(2931.42,3175) 2931.42,3072.01 ccw(c2960.72,3072.01) 2940,3051.29 2996.92,2994.36 ccw(c3015,3012.44) 3015,2986.87 3476.99,2986.87 ccw(c3476.99,3019.41) 3500,2996.4 ccw(c3464.55,3031.86) 3514.69,3031.86 R24.1
STM_JTMS: R25.2 U2.34 | length 807.6
  Top Layer w10: U2.34 2845.63,3201.02 v1(3030,3201.02)
  Bottom Layer w10: v1(3030,3201.02) 3030,3170.51 ccw(c3067.53,3170.51) 3040.99,3143.97 3085.8,3099.17 ccw(c3120,3133.37) 3120,3085 3282.64,3085 ccw(c3282.64,3185) 3353.35,3114.29 3462.4,3223.34 cw(c3514.68,3171.06) R25.2 R25.2@3506.42,3245
STM_RST: C27.1 pad.9 R30.1 U2.7 | length 277.9
  Top Layer w10: v1(3090,3274.24) 3115,3279.84 U2.7 3200,3279.84 ccw(c3200,3312.48) 3223.08,3289.4 pad.9
  Bottom Layer w10: v1(3090,3274.24) cw(c3139.36,3224.88) 3139.36,3294.69 R30.1 C27.1
T_JRST: U2.19
T_JTCK: R9.2 U2.15 U2.26 | length 1152
  Top Layer w10: U2.26 2982.99,3358.58 cw(c2982.99,3328.61) 3004.19,3349.8 cw(c2989.38,3335) 3010.31,3335 3010.31,3320 ; v1(2980,3230) 2980,3262.83 cw(c3044.83,3262.83) 2998.99,3308.67 3010.31,3320 ; U2.15 3073.9,3377.47 cw(c3009.38,3377.47) 3055,3331.84 3052.32,3329.17 cw(c3030.19,3351.3) 3030.19,3320 3010.31,3320
  Bottom Layer w10: v1(2980,3230) 2980,3121 ccw(c3022.68,3121) 2992.5,3090.82 3033,3050.33 ccw(c3070,3087.33) 3070,3035 3390,3035 ccw(c3390,3119.5) 3449.75,3059.75 3481.08,3091.08 cw(c3514.68,3057.48) R9.2
T_JTDI: U2.17
T_JTDO: U2.16
T_JTMS: R16.2 R23.2 U2.27 | length 1000.1
  Top Layer w10: R23.2 ccw(c2814.94,3416.59) 2814.94,3338.9 U2.27 2894.94,3338.9 cw(c2894.94,3308.52) 2916.42,3330 2924.48,3321.94 cw(c2902.42,3299.89) 2933.61,3299.89 2933.61,3289.91 ccw(c2960.65,3289.91) 2941.53,3270.79 v1(2957,3255.31)
  Bottom Layer w10: v1@2955,3255.31 v1(2957,3255.31) 2987.17,3255.31 cw(c2987.17,3237.17) 3000,3250 cw(c2987.93,3237.93) 3005,3237.93 3005,3144.72 ccw(c3052.55,3144.72) 3018.93,3111.1 3054.15,3075.88 ccw(c3092.48,3114.21) 3092.48,3060 3338.32,3060 ccw(c3338.32,3160) 3409.03,3089.29 3480.63,3160.89 cw(c3514.68,3126.84) R16.2
T_NRST: R17.2 U2.18 | length 682.4
  Top Layer w10: U2.18 3014.84,3474.84 v1(3045,3505)
  Bottom Layer w10: v1(3045,3505) 3045,3567.93 cw(c3062.07,3567.93) 3050,3580 cw(c3062.07,3567.93) 3062.07,3585 3335.86,3585 cw(c3335.86,3550.86) 3360,3575 cw(c3335.86,3550.86) 3370,3550.86 3370,3529.14 ccw(c3392.07,3529.14) 3376.46,3513.54 3396.84,3493.16 cw(c3377.15,3473.46) 3405,3473.46 3405,3442.83 cw(c3386.85,3442.83) 3399.68,3430 3370.45,3400.76 ccw(c3371.52,3399.68) R17.2
T_SWDIO_IN: R23.1 U2.25 | length 118
  Top Layer w10: R23.1 2786.93,3422.28 2795,3414.21 2795,3389.98 2806.72,3378.27 U2.25
T_SWO: R19.2 U2.31 | length 1745.8
  Top Layer w10: U2.31 2880.74,3260.16 cw(c2880.74,3243.09) 2892.81,3255.16 2895.83,3252.14 cw(c2873.69,3230) v1(2905,3230)
  Bottom Layer w10: v1(2905,3230) 2905,3070.9 ccw(c2949.31,3070.9) 2917.98,3039.57 2982.16,2975.39 ccw(c3000,2993.22) 3000,2968 3658.96,2968 ccw(c3658.96,3026.04) 3700,2985 ccw(c3675.86,3009.14) 3710,3009.14 3710,3338.79 ccw(c3658.79,3338.79) 3695,3375 ccw(c3673.99,3353.99) 3673.99,3383.7 3650,3383.7 cw(c3650,3440.92) 3609.54,3400.46 3590,3420 ccw(c3564.39,3394.39) 3564.39,3430.61 3521.24,3430.61 ccw(c3521.24,3356.78) 3469.04,3408.98 R19.2
T_VCC: D1.1 P4.4 R1.1 | length 178.5
  Top Layer w10: R1.1 3220,3445.31 P4.4
  Bottom Layer w10: P4.4 3220,3531.46 D1.1
USB_RENUMn: R13.2 U2.38 | length 277.5
  Top Layer w10: v1(2738.74,3050) 2887.88,3050 ccw(c2887.88,3084.14) 2912.02,3060 ccw(c2901.41,3070.61) 2916.42,3070.61 U2.38
  Bottom Layer w10: R13.2 2725,3083.17 ccw(c2771.91,3083.17) v1(2738.74,3050)
pads on no net: U2.4 U2.11 U2.14 U2.21 U2.22 U2.40 U2.41 U2.42 U2.43 U2.45 U2.46 USB.5 USB.A5 USB.A8 USB.B5 USB.B8

## Polygon pours and split planes (outlines as drawn)
GND on Top Layer "Top Layer-GND" (solid, pour order 11): 2210,3025 2210,3530 cw(c2285,3530) 2285,3605 3700,3605 cw(c3700,3575) 3730,3575 3730,2980 cw(c3700,2980) 3700,2950 2285,2950 cw(c2285,3025)
NetC3_2 on Top Layer "Top Layer-5V_USB_CHG 2" (solid, pour order 2): 2540,3400 2725,3400 2725,3535 2540,3535
5V_USB_CHG on Top Layer "Top Layer-5V_USB_CHG 1" (solid, pour order 1): 2464.91,3378.09 2540,3378.09 2540,3391.13 2632.5,3391.13 2632.5,3315 2540,3315 2540,3355 2464.91,3355
5V_USB_CHG on Top Layer "Top Layer-5V_USB_CHG" (solid, pour order 0): 2520,3378.06 2370,3378.06 2370,3161.73 2520,3161.73 2520,3185 2460,3185 2460,3195 2405,3195 2405,3345 2460,3345 2460,3355 2520,3355
GND on Bottom Layer "Bottom Layer-GND" (solid, pour order 13): 2210,3025 2210,3530 cw(c2285,3530) 2285,3605 3700,3605 cw(c3700,3575) 3730,3575 3730,2980 cw(c3700,2980) 3700,2950 2285,2950 cw(c2285,3025)
NetC3_2 on Bottom Layer "Bottom Layer-5V_USB_CHG" (solid, pour order 3): 2540,3529.21 2540,3450 2735,3450 2735,3529.21

## Keep-outs
Keep-Out Layer:
  the board outline again, w10

## Silkscreen, mask and mechanical layers (free items; w line width, h text height)
Top Overlay:
  lines w5: 2500,3535 2500,3585 ; 3610,2985 3474.57,2985 3474.57,3245 3610,3245 ; 2290,3535 2290,3585 2950,3585 2950,3535 2290,3535
  text "MCO" at 2305,3545 h30
  text "GND" at 2405,3545 h30
  text "TVCC" at 2510,3545 h30
  text "RST" at 2645,3545 h30
  text "SWO" at 2750,3545 h30
  text "GND" at 2855,3545 h30
  text "RXD" at 3500,3205 h30
  text "TXD" at 3500,3163 h30
  text "3V3" at 3500,3121 h30
  text "JLCJLCJLCJLC" at 2380,3092.2 h30 r90
  text "GND" at 3500,3079 h30
  text "DIO" at 3500,3037 h30
  text "CLK" at 3500,2995 h30
Bottom Overlay:
  lines w5: 3610,3394.67 3610,3495 ; 3610,3495 3610,3585 3710,3585 3710,3394.33 3510.67,3394.33 3510,3395 3510,3494.33 3510.67,3495 3610,3495
  text "RXD" at 3600,3455 h30
  text "TXD" at 3600,3405 h30
Top Solder:
  text "By Jiang" at 2420,2985 h30
Bottom Solder:
  text "By Jiang" at 2250,3155.31 h30 r270
  text "STLINK V2.1" at 2369.47,3120 h30 r270
Mechanical 1:
  lines w5: 2285,3605 ccw(c2285,3530) 2210,3530 2210,3025 ccw(c2285,3025) 2285,2950 3700,2950 ; 2285,3605 3700,3605 ; 2285,3605 2285,3605 ; 3700,2950 ccw(c3700,2980) 3730,2980 3730,3575 ccw(c3700,3575) 3700,3605 ; 3700,2950 3700,2950 ; 3700,3605 3700,3605